# EAGLE board line_follower.with_sticks (EAGLE 9.3.2)
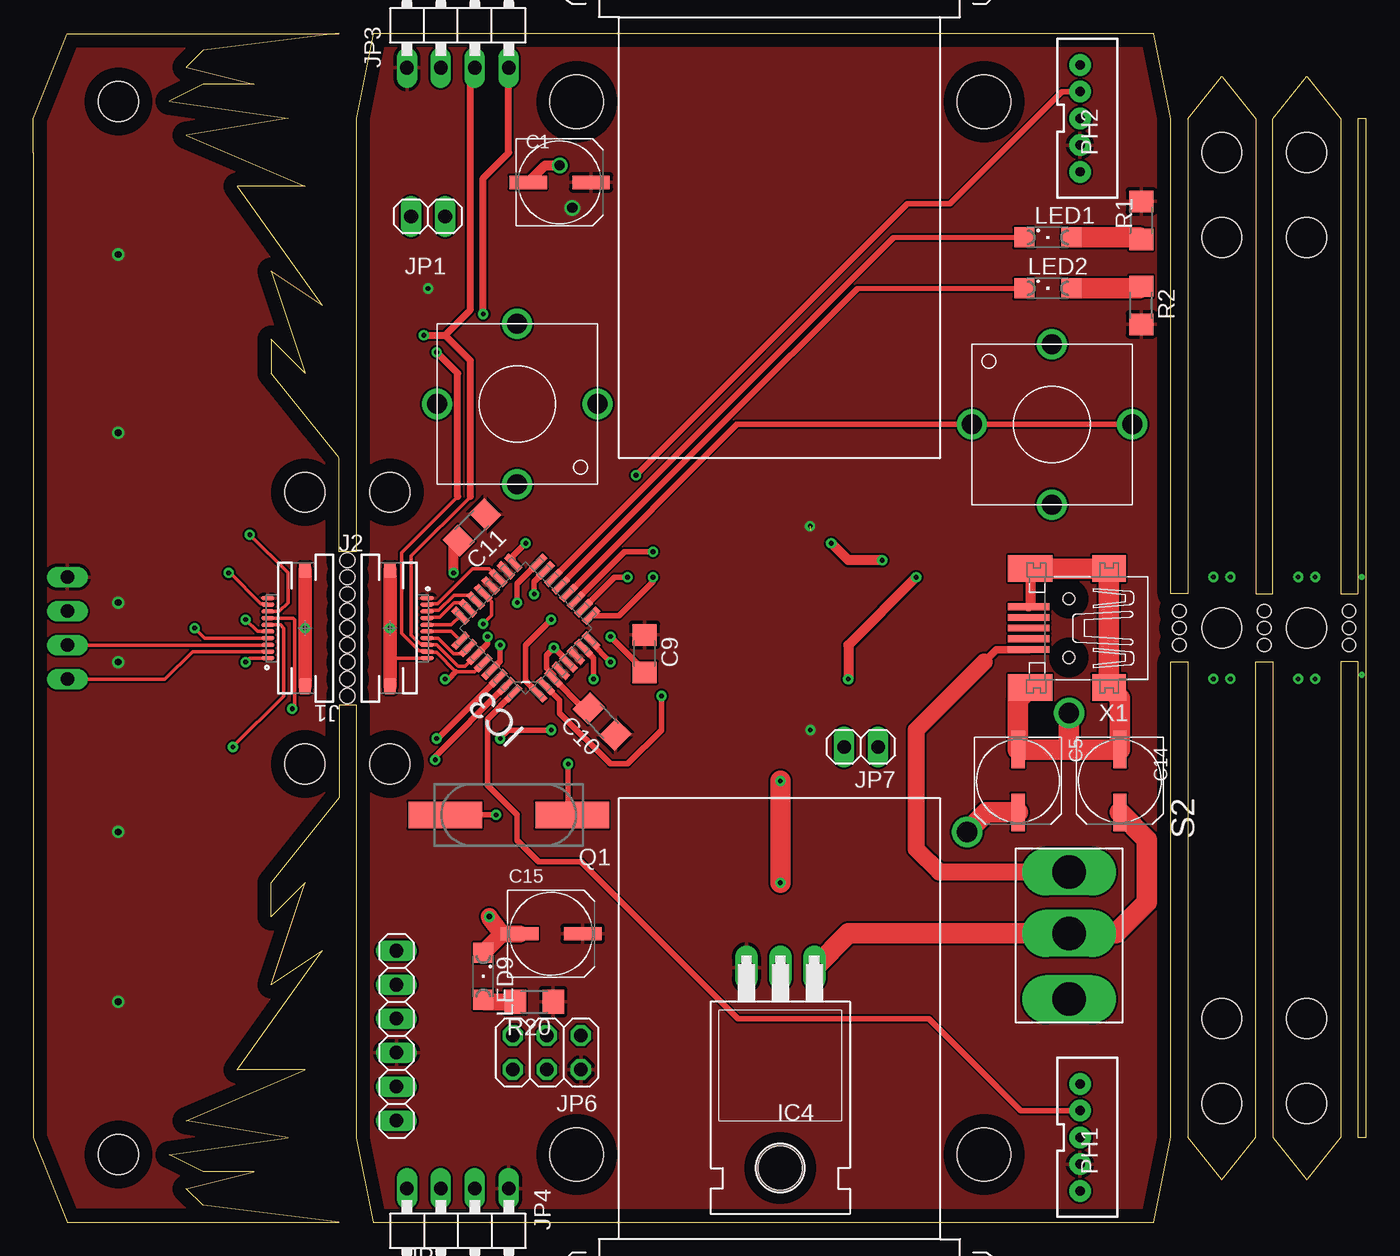
[diagram p0: board, top side]
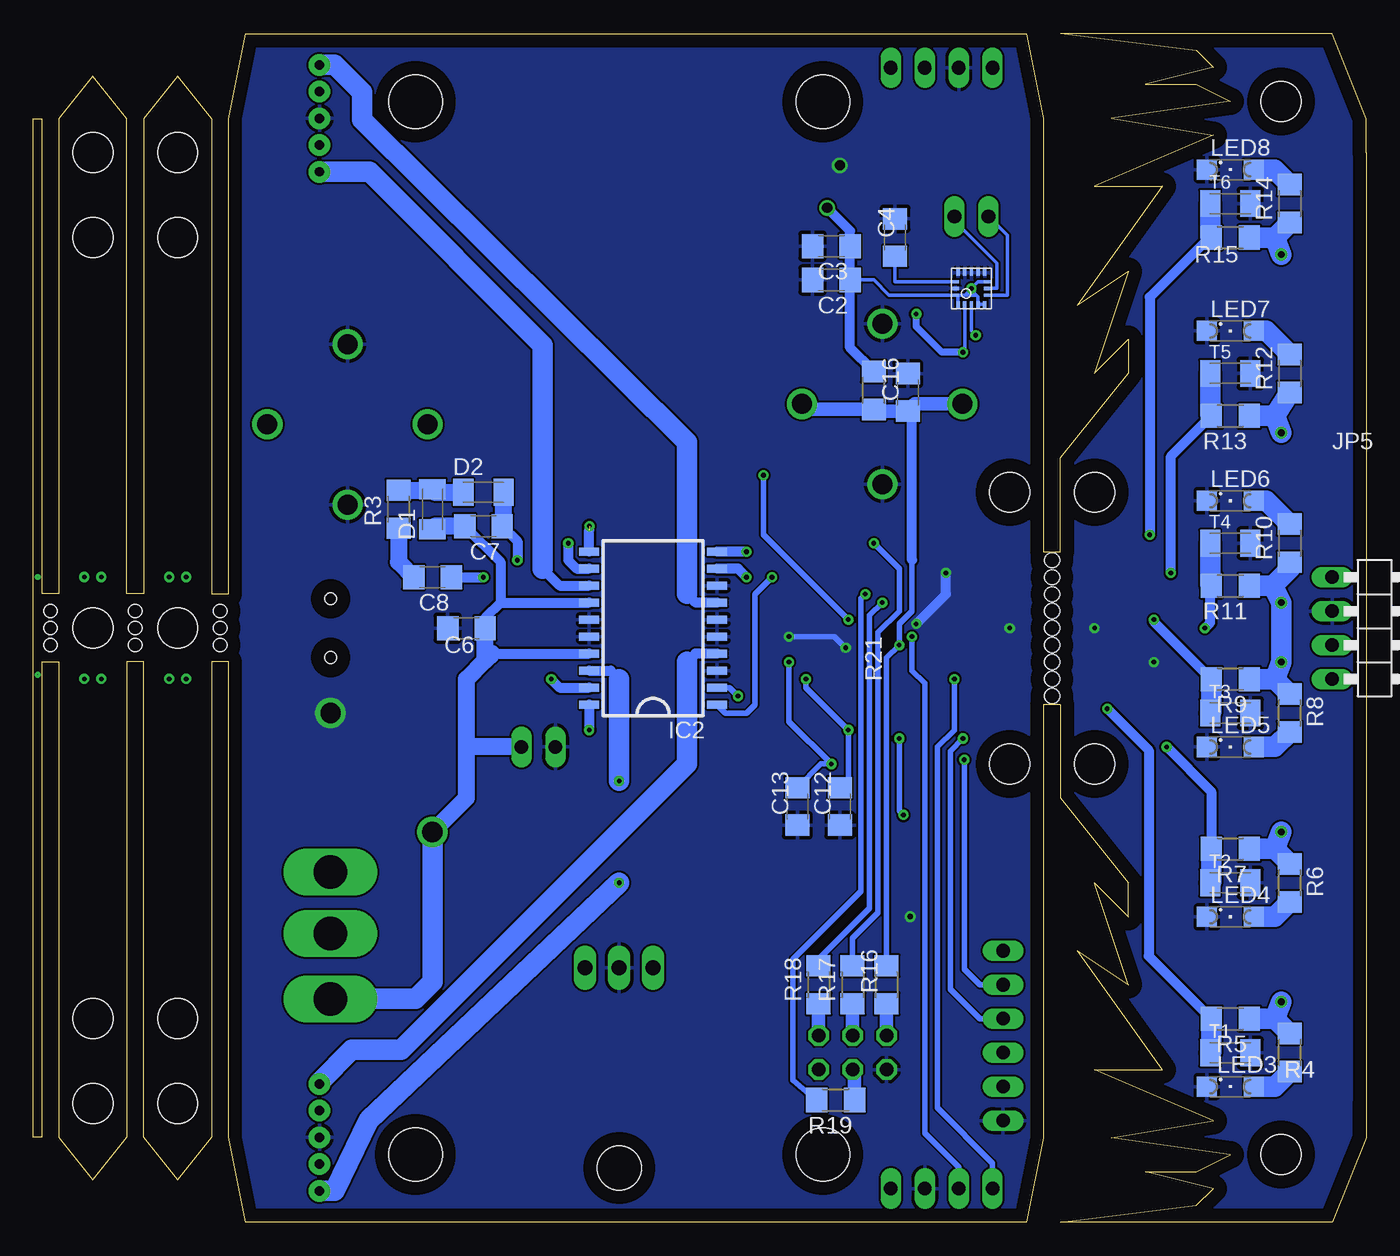
[diagram p1: board, bottom side, seen from below]

Size 99.7 x 88.93 mm. Coordinates in mm from the lower left corner, seen from the top.
Outline: 22.86,57.15 22.86,50.16 24.13,50.16 24.13,82.55 25.4,88.9 83.83,88.91 85.1,82.56 85.1,47 86.37,47 86.37,82.56 88.91,85.74 91.45,82.56 91.45,47 92.72,47 92.72,82.56 95.26,85.74 97.8,82.56 97.8,47 99.07,47 99.07,82.56 99.7,82.56 99.7,6.36 99.07,6.36 99.07,41.92 97.8,41.92 97.8,6.36 95.26,3.19 92.72,6.36 92.72,41.92 91.45,41.92 91.45,6.36 88.91,3.19 86.37,6.36 86.37,41.92 85.1,41.92 85.1,6.36 83.83,0 25.4,0 24.13,6.35 24.13,38.73 22.86,38.73 22.86,31.75 17.78,25.4 17.78,22.86 20.32,25.4 17.78,17.78 21.59,20.32 15.24,11.43 20.32,11.43 11.43,7.62 19.05,6.35 10.16,5.08 12.7,3.81 16.51,3.81 11.43,2.54 12.7,1.27 22.86,0 2.54,0 0,6.35 0,8.89 0,80.01 0,82.55 2.54,88.9 22.86,88.9
Outline: 22.86,57.18 17.78,63.53 17.78,66.07 20.32,63.53 17.78,71.15 21.59,68.61 15.24,77.5 20.32,77.5 11.43,81.31 19.05,82.58 10.16,83.85 12.7,85.12 16.51,85.12 11.43,86.39 12.7,87.66 22.86,88.93
Copper layers (1*16): Top 0.035mm / dielectric 1.5mm / Bottom 0.035mm
Design rules "default": minimum track width 6mil, minimum drill 0.35mm, track to track 6mil, track to pad 6mil, pad to pad 6mil, via to via 6mil, smd to smd 6mil, copper to edge 40mil, drill to drill 6mil, minimum pad ring 10mil, minimum via ring 8mil, stop-mask expansion 4mil, vias tented up to drill 0mil, thermal gap 10mil
Holes 1.12 mm at 23.49,39.37 23.49,40.64 23.49,41.91 23.49,43.18 23.49,44.45 23.49,45.72 23.49,46.99 23.49,48.26 23.49,49.53
Holes 4 mm at 40.64,5.08 71.12,5.08 71.12,83.82 40.64,83.82
Holes 3 mm at 20.32,34.29 20.32,54.61 26.67,54.61 26.67,34.29 6.37,5.09 6.37,83.83 88.91,80.01 95.26,80.02 95.26,8.9 88.91,8.89 95.26,15.25 88.91,15.24 95.26,73.67 88.91,73.66 95.26,44.46 88.91,44.45
Holes 1 mm at 85.73,44.46 92.08,44.46 98.43,44.46 85.73,45.73 85.73,43.19 92.08,43.19 92.08,45.73 98.43,45.73 98.43,43.19

## Footprints (pad centres in the part's own frame; a part is rotated, then mirrored left to right if it is on the bottom)
UD-6,3X5,8_NICHICON = smd 2.8 x 1: + 2.35,0; - -2.35,0
C1206 = smd 1.6 x 1.8: 1 -1.4,0; 2 1.4,0
1206 = smd 1.5 x 2: 1 -1.5,0; 2 1.5,0
LGA-16 = smd 0.5 x 0.25: 1 -1.19,1; 2 -1.19,0.5; 3 -1.19,0; 4 -1.19,-0.5; 5 -1.19,-1; 9 1.19,-1; 10 1.19,-0.5; 11 1.19,0; 12 1.19,0.5; 13 1.19,1 | smd 0.25 x 0.5: 6 -0.5,-1.19; 7 0,-1.19; 8 0.5,-1.19; 14 0.5,1.19; 15 0,1.19; 16 -0.5,1.19
SO20 = smd 0.6 x 1.5: 1 -5.715,-4.78; 2 -4.445,-4.78; 3 -3.175,-4.78; 4 -1.905,-4.78; 5 -0.635,-4.78; 6 0.635,-4.78; 7 1.905,-4.78; 8 3.175,-4.78; 9 4.445,-4.78; 10 5.715,-4.78; 11 5.715,4.78; 12 4.445,4.78; 13 3.175,4.78; 14 1.905,4.78; 15 0.635,4.78; 16 -0.635,4.78; 17 -1.905,4.78; 18 -3.175,4.78; 19 -4.445,4.78; 20 -5.715,4.78
TQFP32 = smd 1.473 x 0.508: 1 -4.115,2.794; 2 -4.115,2.007; 3 -4.115,1.194; 4 -4.115,0.406; 5 -4.115,-0.406; 6 -4.115,-1.194; 7 -4.115,-2.007; 8 -4.115,-2.794; 17 4.115,-2.794; 18 4.115,-2.007; 19 4.115,-1.194; 20 4.115,-0.406; 21 4.115,0.406; 22 4.115,1.194; 23 4.115,2.007; 24 4.115,2.794 | smd 0.508 x 1.473: 9 -2.794,-4.115; 10 -2.007,-4.115; 11 -1.194,-4.115; 12 -0.406,-4.115; 13 0.406,-4.115; 14 1.194,-4.115; 15 2.007,-4.115; 16 2.794,-4.115; 25 2.794,4.115; 26 2.007,4.115; 27 1.194,4.115; 28 0.406,4.115; 29 -0.406,4.115; 30 -1.194,4.115; 31 -2.007,4.115; 32 -2.794,4.115
TO220H = drill 1.118 long: 1 -2.54,-10.16; 2 0,-10.16; 3 2.54,-10.16 | hole 3.302: 0,4.826
GCT_FFC2B05-10-X_REVC = smd 0.3 x 1: 1 -2.25,2.78; 2 -1.75,2.78; 3 -1.25,2.78; 4 -0.75,2.78; 5 -0.25,2.78; 6 0.25,2.78; 7 0.75,2.78; 8 1.25,2.78; 9 1.75,2.78; 10 2.25,2.78 | smd 1.2 x 0.95: 11 -4.35,0; 12 4.35,0
1X02 = drill 1.016 long: 1 -1.27,0; 2 1.27,0
1X06 = drill 1.016 long: 1 -6.35,0; 2 -3.81,0; 3 -1.27,0; 4 1.27,0; 5 3.81,0; 6 6.35,0
1X04/90 = drill 1.016 long: 1 -3.81,-3.81; 2 -1.27,-3.81; 3 1.27,-3.81; 4 3.81,-3.81
2X03 = drill 1.016 octagon: 1 -2.54,-1.27; 2 -2.54,1.27; 3 0,-1.27; 4 0,1.27; 5 2.54,-1.27; 6 2.54,1.27
SML1206 = smd 1.5 x 1.5: A 1.75,0; C -1.75,0
JST-5-PTH-VERT = drill 0.7 pad 1.6: 1 -4,0.18; 2 -2,0.18; 3 0,0.18; 4 2,0.18; 5 4,0.18
CSM-7X-DU = smd 5.5 x 2: 1 -4.75,0; 2 4.75,0
R1206 = smd 1.6 x 1.803: 1 -1.422,0; 2 1.422,0
BUTTON = drill 1.5: A@1 -6,0; A@2 6,0; B@1 0,6; B@2 0,-6
DUALSWITCH = drill 2.5 long: A 0,4.875; B 0,-4.625; COM 0,-0.025
32005-301 = smd 3.1 x 0.5: 1 3,1.6; 2 3,0.8; 3 3,0; 4 3,-0.8; 5 3,-1.6 | smd 2.5 x 2: M1 -3,-4.45; M2 -3,4.45 | smd 3.3 x 2: M3 2.9,4.45; M4 2.9,-4.45 | hole 0.9: 0,2.2; 0,-2.2

## Placement (x,y rotation side)
C1  100u  [UD-6,3X5,8_NICHICON]  39.37,77.79 0 top
C2  100n  [C1206]  40,70.48 180 bottom
C3  100n  [C1206]  40,73.02 180 bottom
C4  10n  [C1206]  35.24,73.66 90 bottom
C5  100u  [UD-6,3X5,8_NICHICON]  73.66,33.02 270 top
C6  100n  [C1206]  67.31,44.45 180 bottom
C7  10n  [C1206]  66.04,52.07 180 bottom
C8  10n  [C1206]  69.85,48.26 180 bottom
C9  100n  [C1206]  45.72,42.55 270 top
C10  100n  [C1206]  42.55,37.47 135 top
C11  100n  [C1206]  32.8,51.98 225 top
C12  22p  [C1206]  39.37,31.11 90 bottom
C13  22p  [C1206]  42.55,31.11 90 bottom
C14  100u  [UD-6,3X5,8_NICHICON]  81.28,33.02 270 top
C15  100u  [UD-6,3X5,8_NICHICON]  38.73,21.59 0 top
C16  100n  [C1206]  34.29,62.08 90 bottom
D1  1N4148  [1206]  69.85,53.34 90 bottom
D2  1N4148  [1206]  66.04,54.61 0 bottom
IC1  L3GD20HSMD  [LGA-16]  29.53,69.85 90 bottom
IC2  L6205  [SO20]  53.34,44.45 90 bottom
IC3  ATMEGA328PMA  [TQFP32]  36.83,44.45 135 top
IC4  LF33  [TO220H]  55.88,8.89 180 top
J1  FFC2B05-10-X_REVC  [GCT_FFC2B05-10-X_REVC]  20.32,44.45 90 top
J2  FFC2B05-10-X_REVC  [GCT_FFC2B05-10-X_REVC]  26.67,44.45 270 top
JP1  [1X02]  29.53,75.25 180 top
JP2  UART  [1X06]  27.16,13.97 90 top
JP3  RDS  [1X04/90]  31.75,90.17 0 top
JP4  LDS  [1X04/90]  31.75,-1.27 180 top
JP5  FDS  [1X04/90]  -1.27,44.45 270 bottom
JP6  ICSP  [2X03]  38.42,12.7 180 top
JP7  3S  [1X02]  61.92,35.57 180 top
LED1  Purple  [SML1206]  75.89,73.67 0 top
LED2  Purple  [SML1206]  75.89,69.86 0 top
LED3  White  [SML1206]  10.16,10.16 0 bottom
LED4  White  [SML1206]  10.16,22.86 0 bottom
LED5  White  [SML1206]  10.16,35.56 0 bottom
LED6  White  [SML1206]  10.16,53.98 0 bottom
LED7  White  [SML1206]  10.16,66.67 0 bottom
LED8  White  [SML1206]  10.16,78.74 0 bottom
LED9  Orange  [SML1206]  33.66,18.41 270 top
PH1  LM  [JST-5-PTH-VERT]  78.12,6.36 270 top
PH2  RM  [JST-5-PTH-VERT]  78.12,82.58 270 top
Q1  10MHz  [CSM-7X-DU]  35.56,30.48 180 top
R1  680  [R1206]  82.88,74.94 90 top
R2  680  [R1206]  82.88,68.59 270 top
R3  220  [R1206]  72.39,53.34 90 bottom
R4  120  [R1206]  5.71,12.7 270 bottom
R5  10k  [R1206]  10.16,15.24 180 bottom
R6  120  [R1206]  5.71,25.4 270 bottom
R7  10k  [R1206]  10.16,27.94 180 bottom
R8  120  [R1206]  5.71,38.1 270 bottom
R9  10k  [R1206]  10.16,40.64 180 bottom
R10  120  [R1206]  5.71,50.8 90 bottom
R11  10k  [R1206]  10.16,47.62 180 bottom
R12  120  [R1206]  5.71,63.5 90 bottom
R13  10k  [R1206]  10.16,60.33 180 bottom
R14  120  [R1206]  5.71,76.2 90 bottom
R15  10k  [R1206]  10.16,73.66 180 bottom
R16  120  [R1206]  35.88,17.78 90 bottom
R17  120  [R1206]  38.42,17.78 90 bottom
R18  120  [R1206]  40.96,17.78 90 bottom
R19  120  [R1206]  39.69,9.16 180 bottom
R20  470  [R1206]  37.46,16.51 180 top
R21  100k  [R1206]  36.83,62.23 270 bottom
S1  BUTTON  [BUTTON]  76.2,59.69 0 top
S2  DUALSWITCH  [DUALSWITCH]  77.47,21.59 180 top
S3  BUTTON  [BUTTON]  36.2,61.21 180 top
T1  ELPT15-21C  [1206]  10.16,12.7 0 bottom
T2  ELPT15-21C  [1206]  10.16,25.4 0 bottom
T3  ELPT15-21C  [1206]  10.16,38.1 0 bottom
T4  ELPT15-21C  [1206]  10.16,50.8 0 bottom
T5  ELPT15-21C  [1206]  10.16,63.5 0 bottom
T6  ELPT15-21C  [1206]  10.16,76.2 0 bottom
X1  MINI-USB-SCHIELD-32005-301  [32005-301]  77.47,44.45 180 top

## Library data of the parts
C1-C16 = rcl; SPICEPREFIX: C
D1 D2 IC1-IC3 S1-S3 T1-T6 = martinmake
IC4 = linear
J1 J2 = FFC2B05-10-X_REVC; AVAILABILITY: Unavailable; DESCRIPTION: FFC/FPC CONNECTOR, RECEPTACLE, 10POS, 1ROW; Series: FFC2B05; Gender: Receptacle; Pitch Spacing: 0.5mm; No. of Contact...; MF: Global Connector Technology; MP: FFC2B05-10-T; PACKAGE: None; PRICE: None
JP1-JP7 = pinhead
LED1-LED9 = led
PH1 PH2 = SparkFun-Connectors
Q1 = crystal; OC_FARNELL: unknown; OC_NEWARK: unknown
R1-R21 = rcl; SPICEPREFIX: R
X1 = con-cypressindustries; OC_FARNELL: unknown; OC_NEWARK: unknown

## Nets
!RESET: C16.1 IC3.29 R16.2 R21.2 S3.A@1 S3.A@2
ADC0: IC3.23 J2.4
ADC1: IC3.24 J2.5
ADC2: IC3.25 J2.6
ADC3: IC3.26 J2.7
ADC6: IC3.19 J2.2
ADC7: IC3.22 J2.3
DIRA: IC2.2 IC3.2
DIRB: IC2.10 IC3.11
F_ADC0: J1.7 R5.2 T1.1
F_ADC1: J1.6 R7.2 T2.1
F_ADC2: J1.5 R9.2 T3.1
F_ADC3: J1.4 R11.2 T4.1
F_ADC6: J1.9 R13.2 T5.1
F_ADC7: J1.8 R15.2 T6.1
F_GND: J1.1 J1.11 J1.12 JP5.2 LED3.C LED4.C LED5.C LED6.C LED7.C LED8.C T1.2 T2.2 T3.2 T4.2 T5.2 T6.2
F_SCL: J1.2 JP5.4
F_SDA: J1.3 JP5.3
F_VCC: J1.10 JP5.1 R4.1 R5.1 R6.1 R7.1 R8.1 R9.1 R10.1 R11.1 R12.1 R13.1 R14.1 R15.1
GND: C1.- C2.2 C3.2 C4.2 C5.- C6.2 C9.2 C10.2 C11.2 C12.1 C13.1 C14.- C15.- C16.2 IC1.9 IC1.10 IC1.11 IC1.12 IC1.13 IC1.15 IC2.3 IC2.5 IC2.6 IC2.8 IC2.15 IC2.16 IC3.3 IC3.5 IC3.21 IC4.2 J2.10 J2.11 J2.12 JP2.1 JP3.2 JP4.2 JP6.6 JP7.2 LED9.C PH1.3 PH2.3 S1.B@1 S1.B@2 S3.B@1 S3.B@2 X1.5 X1.M1 X1.M2 X1.M3 X1.M4
INT0: IC3.32 PH1.2
INT1: IC3.1 PH2.2
LEDA: IC3.13 LED2.C
LEDB: IC3.14 LED1.C
MISO: IC3.16 R18.2
MOSI: IC3.15 R19.2
N$1: LED5.A R8.2
N$2: C7.1 D2.2 IC2.12
N$3: D1.2 D2.1 R3.2
N$4: C8.2 R3.1
N$5: LED1.A R1.1
N$6: C4.1 IC1.14
N$7: C8.1 IC2.19
N$8: IC1.7 JP1.1
N$9: IC1.6 JP1.2
N$10: C14.+ IC4.1 S2.COM
N$12: LED6.A R10.2
N$13: LED2.A R2.1
N$22: LED8.A R14.2
N$30: LED7.A R12.2
N$33: JP6.1 R18.1
N$36: LED9.A R20.2
N$43: LED4.A R6.2
N$47: LED3.A R4.2
N$49: JP6.3 R17.1
N$50: JP6.5 R16.1
N$51: JP6.4 R19.1
OC0A: IC2.1 IC3.10
OC0B: IC2.9 IC3.9
OUT1A: IC2.4 PH1.1
OUT1B: IC2.7 PH2.1
OUT2A: IC2.18 PH1.5
OUT2B: IC2.13 PH2.5
RX: IC3.30 JP2.4
SCK: IC3.17 R17.2
SCL: IC1.2 IC3.28 J2.9 JP3.4 JP4.4
SDA: IC1.3 IC3.27 J2.8 JP3.3 JP4.3
TX: IC3.31 JP2.5
USR: IC3.12 S1.A@1 S1.A@2
VB: C5.+ C6.1 C7.2 D1.1 IC2.14 IC2.17 JP7.1 S2.A
VCC: C1.+ C2.1 C3.1 C9.1 C10.1 C11.1 C15.+ IC1.1 IC1.4 IC1.5 IC1.8 IC1.16 IC2.11 IC2.20 IC3.4 IC3.6 IC3.18 IC3.20 IC4.3 J2.1 JP2.3 JP3.1 JP4.1 JP6.2 PH1.4 PH2.4 R1.2 R2.2 R20.1 R21.1
VUSB: S2.B X1.1
XTAL1: C12.2 IC3.7 Q1.2
XTAL2: C13.2 IC3.8 Q1.1

## Tracks (layer width: path | path; a pad name or v marks a point on that pad's centre or on a via)
!RESET  (via drill 0.35)
  Top 0.406: v34.92,43.18 34.92,41.97 IC3.29
  Bottom 0.406: 35.88,19.77 R16.2 35.88,42.23 v34.92,43.18 34.92,44.77 33.97,45.72 33.97,49.53
  Bottom 0.762: 33.97,49.53 33.97,60.36 C16.1
  Bottom 1.016: S3.A@2 33.75,61.21 C16.1 36.7,60.68 R21.2 41.79,60.81 S3.A@1
ADC0
  Top 0.254: J2.4 29.52,45.27 30.39,45.27 31.49,46.36 32.08,46.36 IC3.23
ADC1
  Top 0.254: IC3.24 31.26,44.7 J2.5
ADC2
  Top 0.254: IC3.25 31.26,44.2 J2.6
ADC3
  Top 0.254: IC3.26 32.08,42.54 31.44,42.54 30.28,43.7 J2.7
ADC6
  Top 0.254: J2.2 29.52,46.27 30.24,46.27 32.87,48.89 34.07,48.89 IC3.19
ADC7
  Top 0.254: J2.3 29.52,45.77 30.32,45.77 31.47,46.92 32.67,46.92 IC3.22
DIRA  (via drill 0.35)
  Top 0.406: IC3.2 39.37,39.07 39.37,38.1 43.18,34.29 44.45,34.29 46.99,36.83 v46.99,39.37
  Bottom 0.406: v46.99,39.37 47.62,40 IC2.2
DIRB  (via drill 0.35)
  Top 0.406: IC3.11 44.23,50.16 v46.35,50.16
  Bottom 0.762: v46.35,50.16 IC2.10
F_ADC0  (via drill 0.35)
  Top 0.254: J1.7 19.42,45.2 19.53,45.08 19.53,38.58 v19.37,38.42
  Bottom 0.762: R5.2 16.26,19.92 16.26,35.31 v19.37,38.42
  Bottom 1.524: T1.1 11.58,12.78 R5.2
F_ADC1  (via drill 0.35)
  Top 0.254: J1.6 18.48,44.7 18.73,44.45 18.73,39.37 v14.92,35.56
  Bottom 0.762: v14.92,35.56 11.58,32.22 R7.2
  Bottom 1.524: T2.1 11.58,25.48 R7.2
F_ADC2  (via drill 0.35)
  Top 0.254: J1.5 16.76,44.2 v15.87,45.08
  Bottom 0.254: v15.87,45.08 15.87,44.93
  Bottom 0.762: 15.87,44.93 R9.2
  Bottom 1.524: T3.1 11.58,38.18 R9.2
F_ADC3  (via drill 0.35)
  Top 0.254: J1.4 12.81,43.7 v12.06,44.45
  Bottom 0.762: v12.06,44.45 11.66,44.85 11.66,47.7
  Bottom 1.524: T4.1 11.66,47.7 R11.2
F_ADC6  (via drill 0.35)
  Top 0.254: J1.9 17.47,46.27 17.01,46.27 14.71,48.58 v14.6,48.58
  Bottom 0.762: v14.6,48.58 14.6,57.3 R13.2
  Bottom 1.524: T5.1 11.66,60.4 R13.2
F_ADC7  (via drill 0.35)
  Top 0.254: J1.8 18.39,45.7 19.05,46.35 19.05,48.58 v16.19,51.43
  Bottom 0.762: v16.19,51.43 16.19,69.21 11.66,73.74
  Bottom 1.524: T6.1 11.66,73.74 R15.2
F_GND  (via drill 0.35)
  Top 0.254: 20.03,42.2 20.32,41.91 | J1.1 16.16,42.2 v15.87,41.91
  Top 1.016: J1.11 20.32,41.91 v20.32,44.45 J1.12
  pour Bottom: 0,0 22.86,0 22.86,88.9 0,88.9
F_SCL
  Top 0.254: J1.2 11.9,42.7 9.84,40.64 JP5.4
F_SDA
  Top 0.254: J1.3 17.52,43.18 JP5.3
F_VCC  (via drill 0.5)
  Bottom 1.524: R6.1 6.83,27.94 | 6.83,27.94 R7.1 | R8.1 6.83,40.64 | 6.83,40.64 R9.1 | 6.83,73.66 R14.1 | R4.1 6.83,15.24 | 6.83,15.24 R5.1 | v6.35,72.39 6.83,73.66 | v6.35,29.21 6.83,27.94 | v6.35,16.51 6.83,15.24 | R15.1 6.83,73.66 | v6.35,59.05 6.83,60.32 | R12.1 6.83,60.32 | 6.83,60.32 R13.1 | R10.1 5.71,48.89 6.98,47.62 | 6.98,47.62 R11.1 | 6.83,40.64 v6.35,41.91 v6.35,46.35 6.98,47.62
  pour Top: 22.86,88.9 22.86,0 0,0 0,88.9
GND  (via drill 0.35, 0.4, 0.76, 1.52)
  Top 0.254: J2.10 27.01,42.2 | IC3.21 34.29,46.42 34.29,45.4 v33.65,44.77 | 31.43,50.61 C11.2
  Top 0.406: 27.01,42.2 26.67,42.54 | IC3.5 40.03,41.89 v38.94,42.98 38.4,42.44 38.4,41.45 38.9,40.95 IC3.3 41.14,38.45 C10.2 | v43.18,43.81 45.72,41.27 C9.2
  Top 0.762: X1.M4 74.57,46.15 X1.5 | v31.43,48.58 31.43,50.61 | C1.- 38.29,79.06 v39.37,79.06
  Top 1.016: J2.12 26.67,42.54 v26.67,44.45 J2.11
  Top 1.27: LED9.C 35.08,21.59 | 35.08,21.59 C15.- | 35.08,21.59 v34.11,22.87
  Top 1.524: 77.47,35.37 C5.- 73.66,39.09 X1.M3 | 77.47,35.37 C14.- 81.28,39.19 X1.M2 X1.M1 X1.M4 | 77.47,35.37 v77.47,38.1
  Bottom 0.406: v38.94,42.98 39.77,43.81 v43.18,43.81
  Bottom 0.762: v33.65,44.77 31.43,46.99 v31.43,48.58
  pour Bottom: 24.13,0 99.7,0 99.7,88.9 24.13,88.9
INT0
  Top 0.406: IC3.32 33.97,37.64 33.97,32.7 36.19,30.48 36.19,28.57 37.78,26.99 40.96,26.99 52.7,15.24 67,15.24 73.88,8.36 PH1.2
INT1  (via drill 0.35)
  Top 0.406: v45.08,55.88 65.4,76.2 68.58,76.2 76.96,84.58 PH2.2 | IC3.1 36.83,40.5 36.83,43.18 v38.73,45.08
  Bottom 0.406: v45.08,55.88 45.08,51.43 v38.73,45.08
LEDA
  Top 0.406: IC3.13 51.78,59.98 | 51.78,59.98 | LED2.C 61.65,69.85 51.78,59.98
LEDB
  Top 0.406: LED1.C 64.35,73.66 IC3.14
MISO  (via drill 0.35)
  Top 0.406: IC3.16 36.19,47.77 v36.19,46.35
  Bottom 0.406: v36.19,46.35 37.15,45.4 37.15,23.49 40.96,19.68 R18.2 41.27,19.52
MOSI  (via drill 0.35)
  Top 0.406: IC3.15 37.46,47.92 v37.46,46.99
  Bottom 0.406: R19.2 42.86,10.64 42.86,19.68 37.78,24.76 37.78,46.67 v37.46,46.99
N$1
  Bottom 1.524: LED5.A 6.83,35.56 R8.2
N$2  (via drill 0.35)
  Top 0.762: v63.5,49.53 60.96,49.53 v59.69,50.8
  Bottom 0.762: C7.1 63.5,50.93 v63.5,49.53 | v59.69,50.8 59.69,49.53 59.05,48.89 IC2.12
  Bottom 1.27: C7.1 64.54,52.17 D2.2
N$3
  Bottom 1.27: R3.2 69.93,54.76 D1.2 69.62,54.61 D2.1
N$4
  Bottom 1.27: R3.1 72.39,49.4 C8.2
N$5
  Top 1.524: LED1.A 82.72,73.67 R1.1
N$6
  Bottom 0.254: IC1.14 35.24,70.35 C4.1
N$7  (via drill 0.35)
  Top 0.762: v66.04,48.26 60.96,43.18 v60.96,40.64
  Bottom 0.762: C8.1 v66.04,48.26 | v60.96,40.64 60.32,40 IC2.19
N$8
  Bottom 0.254: IC1.7 27.62,69.85 27.62,71.75 30.8,74.93 JP1.1
N$9
  Bottom 0.254: IC1.6 26.85,69.35 26.85,73.84 JP1.2
N$10
  Top 1.524: IC4.1 60.98,21.61 S2.COM 80.97,21.61 83.31,23.96 83.31,28.64 C14.+
N$11  (via drill 0.35)
  other vias: 89.54,48.27
N$12
  Bottom 1.524: R10.2 7.47,53.97 LED6.A
N$13
  Top 1.27: 82.72,69.86 R2.1
  Top 1.524: LED2.A 82.72,69.86
N$14  (via drill 0.35)
  other vias: 88.27,48.27
N$15  (via drill 0.35)
  other vias: 88.27,40.65
N$16  (via drill 0.35)
  other vias: 89.54,40.65
N$17  (via drill 0.35)
  other vias: 94.62,40.65
N$18  (via drill 0.35)
  other vias: 95.89,40.65
N$19  (via drill 0.35)
  other vias: 94.62,48.27
N$20  (via drill 0.35)
  other vias: 95.89,48.27
N$21  (via drill 0.03)
  other vias: 99.39,48.27
N$22
  Bottom 1.524: R14.2 6.83,78.74 LED8.A
N$23  (via drill 0.03)
  other vias: 99.39,40.97
N$30
  Bottom 1.524: R12.2 7.47,66.67 LED7.A
N$33
  Bottom 1.016: R18.1 JP6.1
N$36
  Top 1.27: LED9.A 33.65,16.51 R20.2
N$43
  Bottom 1.524: LED4.A 6.83,22.86 R6.2
N$47
  Bottom 1.524: LED3.A 6.83,10.16 R4.2
N$49
  Bottom 1.016: R17.1 JP6.3
N$50
  Bottom 1.016: R16.1 JP6.5
N$51
  Bottom 1.016: R19.1 38.27,11.28 JP6.4
OC0A  (via drill 0.35)
  Top 0.406: IC3.10 43.48,48.26 v44.45,48.26
  Bottom 0.406: v44.45,48.26 45.72,46.99 45.72,38.73 46.35,38.1 47.92,38.1 IC2.1
OC0B  (via drill 0.35)
  Top 0.406: IC3.9 43.81,45.38 46.35,47.92 v46.35,48.26
  Bottom 0.762: v46.35,48.26 46.99,48.89 IC2.9
OUT1A
  Bottom 0.762: IC2.4 50.18,42.54 50.8,41.92
  Bottom 1.524: 50.8,41.92 50.8,34.3 72.2,12.9 75.89,12.9 78.3,10.49 PH1.1
OUT1B
  Bottom 0.762: IC2.7 50.15,46.35 50.8,47
  Bottom 1.524: 50.8,47 50.8,58.34 75.13,82.47 75.13,84.54 77.16,86.58 PH2.1
OUT2A  (via drill 0.35)
  Top 1.524: v55.88,25.41 v55.88,33.02
  Bottom 0.762: IC2.18 56.51,41.27 55.88,40.64
  Bottom 1.524: 55.88,40.64 v55.88,33.02 | PH1.5 77.16,2.36 74.62,7.63 v55.88,25.41
OUT2B
  Bottom 0.762: IC2.13 60.32,47.62 61.59,48.89
  Bottom 1.524: 61.59,48.89 61.59,65.6 74.57,78.58 PH2.5
RX  (via drill 0.35)
  Top 0.406: v30.16,36.19 30.26,36.19 IC3.30
  Bottom 0.406: v30.16,36.19 31.11,35.24 31.11,17.45 28.9,15.24 JP2.4
SCK  (via drill 0.35)
  Top 0.406: IC3.17 35.9,49.87 v36.83,50.8
  Bottom 0.406: v36.83,50.8 34.92,48.89 34.92,45.72 36.51,44.13 36.51,23.18 38.42,21.27 R17.2 38.42,19.68
SCL  (via drill 0.35)
  Top 0.254: IC3.28 32.99,41.19 31.6,41.19 30.16,42.63 29.52,42.63 J2.9 29.38,42.77 28.85,42.77 27.53,44.08 27.53,50.08 31.75,54.29
  Top 0.406: 31.6,41.19 31.06,40.64 v30.8,40.64
  Top 0.508: 31.75,54.29 31.75,63.5 v30.16,65.09 | v33.65,67.94 33.65,78.1 35.56,80.01 JP3.4
  Bottom 0.254: v30.16,65.09 30.03,65.22 IC1.2
  Bottom 0.406: JP4.4 27.94,4.44 32.07,8.57 32.07,35.56 30.8,36.83 v30.8,40.64
  Bottom 0.508: v30.16,65.09 31.75,65.09 33.65,66.99 v33.65,67.94
SDA  (via drill 0.35)
  Top 0.254: IC3.27 32.28,41.59 31.77,41.59 30.16,43.2 J2.8 29.38,43.27 28.92,43.27 28.26,43.94 28.26,49.85 32.7,54.29
  Top 0.406: IC3.27 33.97,43.28 v33.97,43.81
  Top 0.508: 32.7,54.29 32.7,64.45 30.8,66.36 | v29.21,66.36 30.8,66.36 | 30.8,66.36 32.7,68.26 32.7,86.04 JP3.3
  Bottom 0.254: v29.21,66.36 29.53,66.67 IC1.3
  Bottom 0.406: v33.97,43.81 33.97,41.27 33.02,40.32 33.02,6.67 30.48,4.13 JP4.3
TX  (via drill 0.35)
  Top 0.406: v30.06,34.61 30.06,34.85 IC3.31
  Bottom 0.406: JP2.5 28.9,17.78 30.06,18.94 v30.06,34.61
USR
  Top 0.406: S1.A@2 S1.A@1 52.61,59.69 52.61,59.65 IC3.12
VB  (via drill 1.52)
  Top 1.524: v69.85,29.21 71.31,30.67 C5.+
  Bottom 0.559: 65.91,45.21 C6.1
  Bottom 0.762: 65.4,42.54 IC2.17 | 64.77,46.35 IC2.14 | 64.77,46.35 65.91,45.21 | C7.2 64.77,49.4 64.77,46.35
  Bottom 1.27: v69.85,29.21 67.31,31.75 67.31,35.57 | 67.31,35.57 67.31,40.64 65.91,42.04 | 65.91,42.04 C6.1 | 65.4,42.54 65.91,42.04 | C7.2 69.62,52.07 D1.1 | JP7.1 67.31,35.57
  Bottom 1.524: S2.A 71.12,16.71 69.85,17.98 v69.85,29.21
VCC  (via drill 0.35, 0.76)  (1 unrouted)
  Bottom 0.254: C2.1 36.83,70.48 35.69,69.35 IC1.16 30.48,69.35 | IC1.5 IC1.4 29.03,69.21 29.16,69.35 | 29.16,69.35 30.03,69.35 | 30.03,69.35 30.48,69.35 | IC1.8 29.03,70.35 v29.53,69.85 | v29.53,69.85 29.53,69.71 29.16,69.35 | v29.53,69.85 30.03,69.35 | IC1.1 30.53,69.3 30.48,69.35
  Bottom 0.762: IC2.20 v58.12,36.83 | IC2.11 58.12,51.77 | v40.32,75.88 38.6,74.16 C3.1 C2.1 38.6,65.43 R21.1
  other vias: 58.11,52.08
  pour Top: 24.13,88.9 99.7,88.9 99.7,0 24.13,0
VUSB
  Top 0.559: X1.1 72.06,42.85 71.12,41.91
  Top 1.27: 71.12,41.91 66.04,36.83 66.04,27.94 67.76,26.21 S2.B
XTAL1  (via drill 0.35)
  Top 0.406: IC3.7 41.91,42.21 v41.91,40.64 | v34.92,36.19 35.56,36.83 v38.73,36.83 | Q1.2 v34.61,30.48
  Bottom 0.406: v41.91,40.64 41.91,40 v38.73,36.83 38.73,33.15 C12.2 | v34.61,30.48 34.92,30.8 v34.92,36.19
XTAL2  (via drill 0.35)
  Top 0.406: Q1.1 40,30.78 v40,34.29 | v43.18,41.91 41.72,43.37 IC3.8
  Bottom 0.406: C13.2 40.77,34.29 v40,34.29 43.18,37.46 v43.18,41.91

## Text on the board
tStop: MARTIN MAKE | MARTIN MAKE | MARTIN MAKE | MARTIN MAKE
bStop: MARTIN MAKE | MARTIN MAKE | MARTIN MAKE | MARTIN MAKE